# EAGLE board Brilliant Wluff-Jaban (EAGLE 9.7.0)

Size 84.08 x 99.16 mm. Coordinates in mm from the lower left corner, seen from the top.
Outline: 0,0 84.08,0 84.08,99.16 0,99.16 0,0
Copper layers (1*16): Top 0.035mm / dielectric 1.5mm / Bottom 0.035mm
Design rules "default": minimum track width 6mil, minimum drill 0.35mm, track to track 6mil, track to pad 6mil, pad to pad 6mil, via to via 6mil, smd to smd 6mil, copper to edge 40mil, drill to drill 6mil, minimum pad ring 10mil, minimum via ring 8mil, stop-mask expansion 4mil, vias tented up to drill 0mil, thermal gap 10mil

## Footprints (pad centres in the part's own frame; a part is rotated, then mirrored left to right if it is on the bottom)
LEDRD254W60D565H860B_B = drill 0.981 pad 1.581: 1 -1.27,0; 2 1.27,0
LEDRD254W60D565H860B_O = drill 0.981 pad 1.581: 1 -1.27,0; 2 1.27,0
RESAD1016W63L850D250B = drill 0.83 pad 1.43: 1 -5.08,0; 2 5.08,0
ARDUINO-UNO-R3-SHIELD = drill 1.016 pad 1.88: 3.3V 24.13,-2.54; 5V 24.13,0; A0 24.13,12.7; A1 24.13,15.24; A2 24.13,17.78; A3 24.13,20.32; A4 24.13,22.86; A5 24.13,25.4; AREF -24.13,-13.97; D2 -24.13,20.32; D3 -24.13,17.78; D4 -24.13,15.24; D5 -24.13,12.7; D6 -24.13,10.16; D7 -24.13,7.62; D8 -24.13,3.81; D9 -24.13,1.27; D10 -24.13,-1.27; D11 -24.13,-3.81; D12 -24.13,-6.35; D13 -24.13,-8.89; GND@0 24.13,2.54; GND@1 24.13,5.08; GND@2 -24.13,-11.43; IOREF 24.13,-7.62; NC 24.13,-10.16; RES 24.13,-5.08; RX -24.13,25.4; SCL -24.13,-19.05; SDA -24.13,-16.51; TX -24.13,22.86; VIN 24.13,7.62
DIP762W53P254L1969H508Q14B = drill 0.743 pad 1.343: 1 -3.81,7.62; 2 -3.81,5.08; 3 -3.81,2.54; 4 -3.81,0; 5 -3.81,-2.54; 6 -3.81,-5.08; 7 -3.81,-7.62; 8 3.81,-7.62; 9 3.81,-5.08; 10 3.81,-2.54; 11 3.81,0; 12 3.81,2.54; 13 3.81,5.08; 14 3.81,7.62

## Placement (x,y rotation side)
D1  BLUE  [LEDRD254W60D565H860B_B]  9.47,17.3 0 top
D2  ORANGE  [LEDRD254W60D565H860B_O]  17.09,17.3 0 top
R1  1k  [RESAD1016W63L850D250B]  18.36,27.46 90 top
R2  1k  [RESAD1016W63L850D250B]  10.74,27.46 90 top
U1  ARDUINO-UNO-R3-SHIELD  [ARDUINO-UNO-R3-SHIELD]  34.52,69.31 90 top
U2  74HC32_PDIP  [DIP762W53P254L1969H508Q14B]  69.16,8.41 90 top
U3  74HC86_PDIP  [DIP762W53P254L1969H508Q14B]  28.52,8.41 90 top
U5  74HC08_PDIP  [DIP762W53P254L1969H508Q14B]  48.84,8.41 90 top

## Library data of the parts
D1 = Tinkercad; CATEGORY: Opto-Electronic; SUB-CATEGORY: LED; VALUE: LED_BLUE
D2 = Tinkercad; CATEGORY: Opto-Electronic; SUB-CATEGORY: LED; VALUE: LED_ORANGE
R1 R2 U1-U3 U5 = Tinkercad

## Nets
D1_C: D1.2 R2.1
D2_C: D2.2 R1.1
U1_5V: U1.5V U2.14 U3.14 U5.14
U1_D2: U1.D2 U3.4 U5.4
U1_D3: U1.D3 U3.2 U5.2
U1_D4: U1.D4 U3.1 U5.1
U1_GND: R1.2 R2.2 U1.GND@0 U1.GND@1 U1.GND@2 U2.7 U3.7 U5.7
U2_1Y: D2.1 U2.3
U3_1Y: U3.3 U3.5 U5.5
U3_2Y: D1.1 U3.6
U5_1Y: U2.1 U5.3
U5_2Y: U2.2 U5.6

## Tracks (layer width: path | path; a pad name or v marks a point on that pad's centre or on a via)
D1_C  (1 unrouted)
D2_C  (1 unrouted)
U1_5V  (3 unrouted)
U1_D2  (2 unrouted)
U1_D3  (2 unrouted)
U1_D4  (2 unrouted)
U1_GND  (7 unrouted)
U2_1Y  (1 unrouted)
U3_1Y  (2 unrouted)
U3_2Y  (1 unrouted)
U5_1Y  (1 unrouted)
U5_2Y  (1 unrouted)